# EAGLE board AVR-Pocket-Programmer-GiantPanel-v11 (EAGLE 6.5.0), part 1 of 5
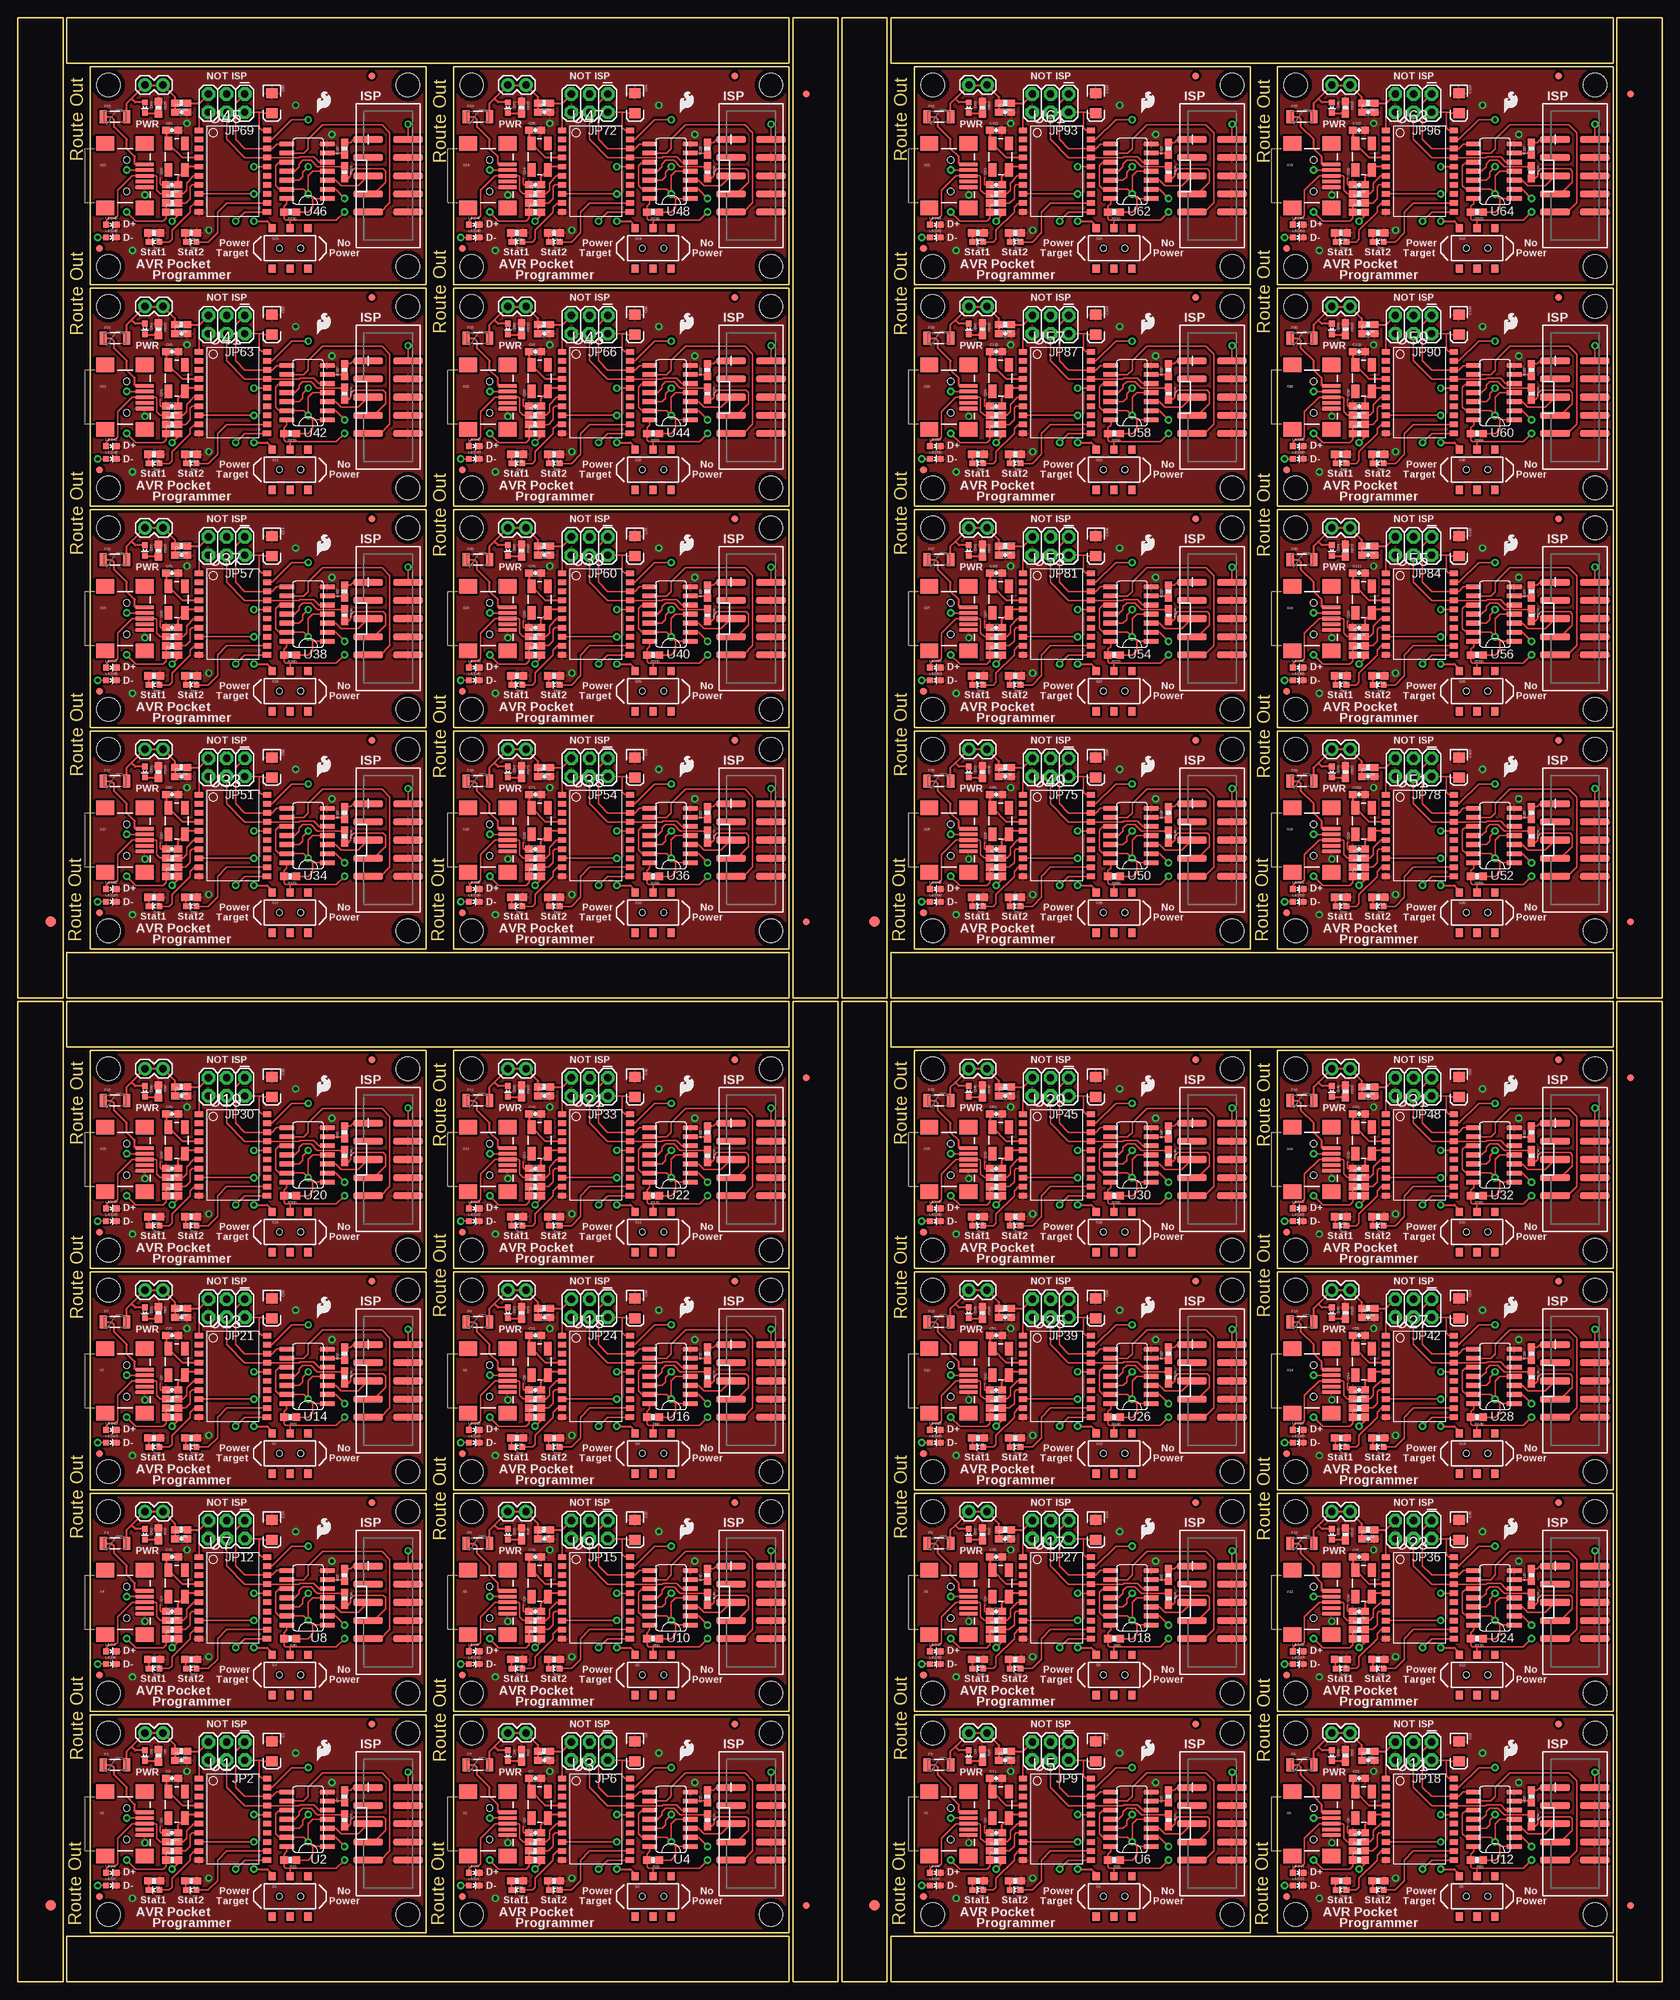
[diagram p0: board, top side]
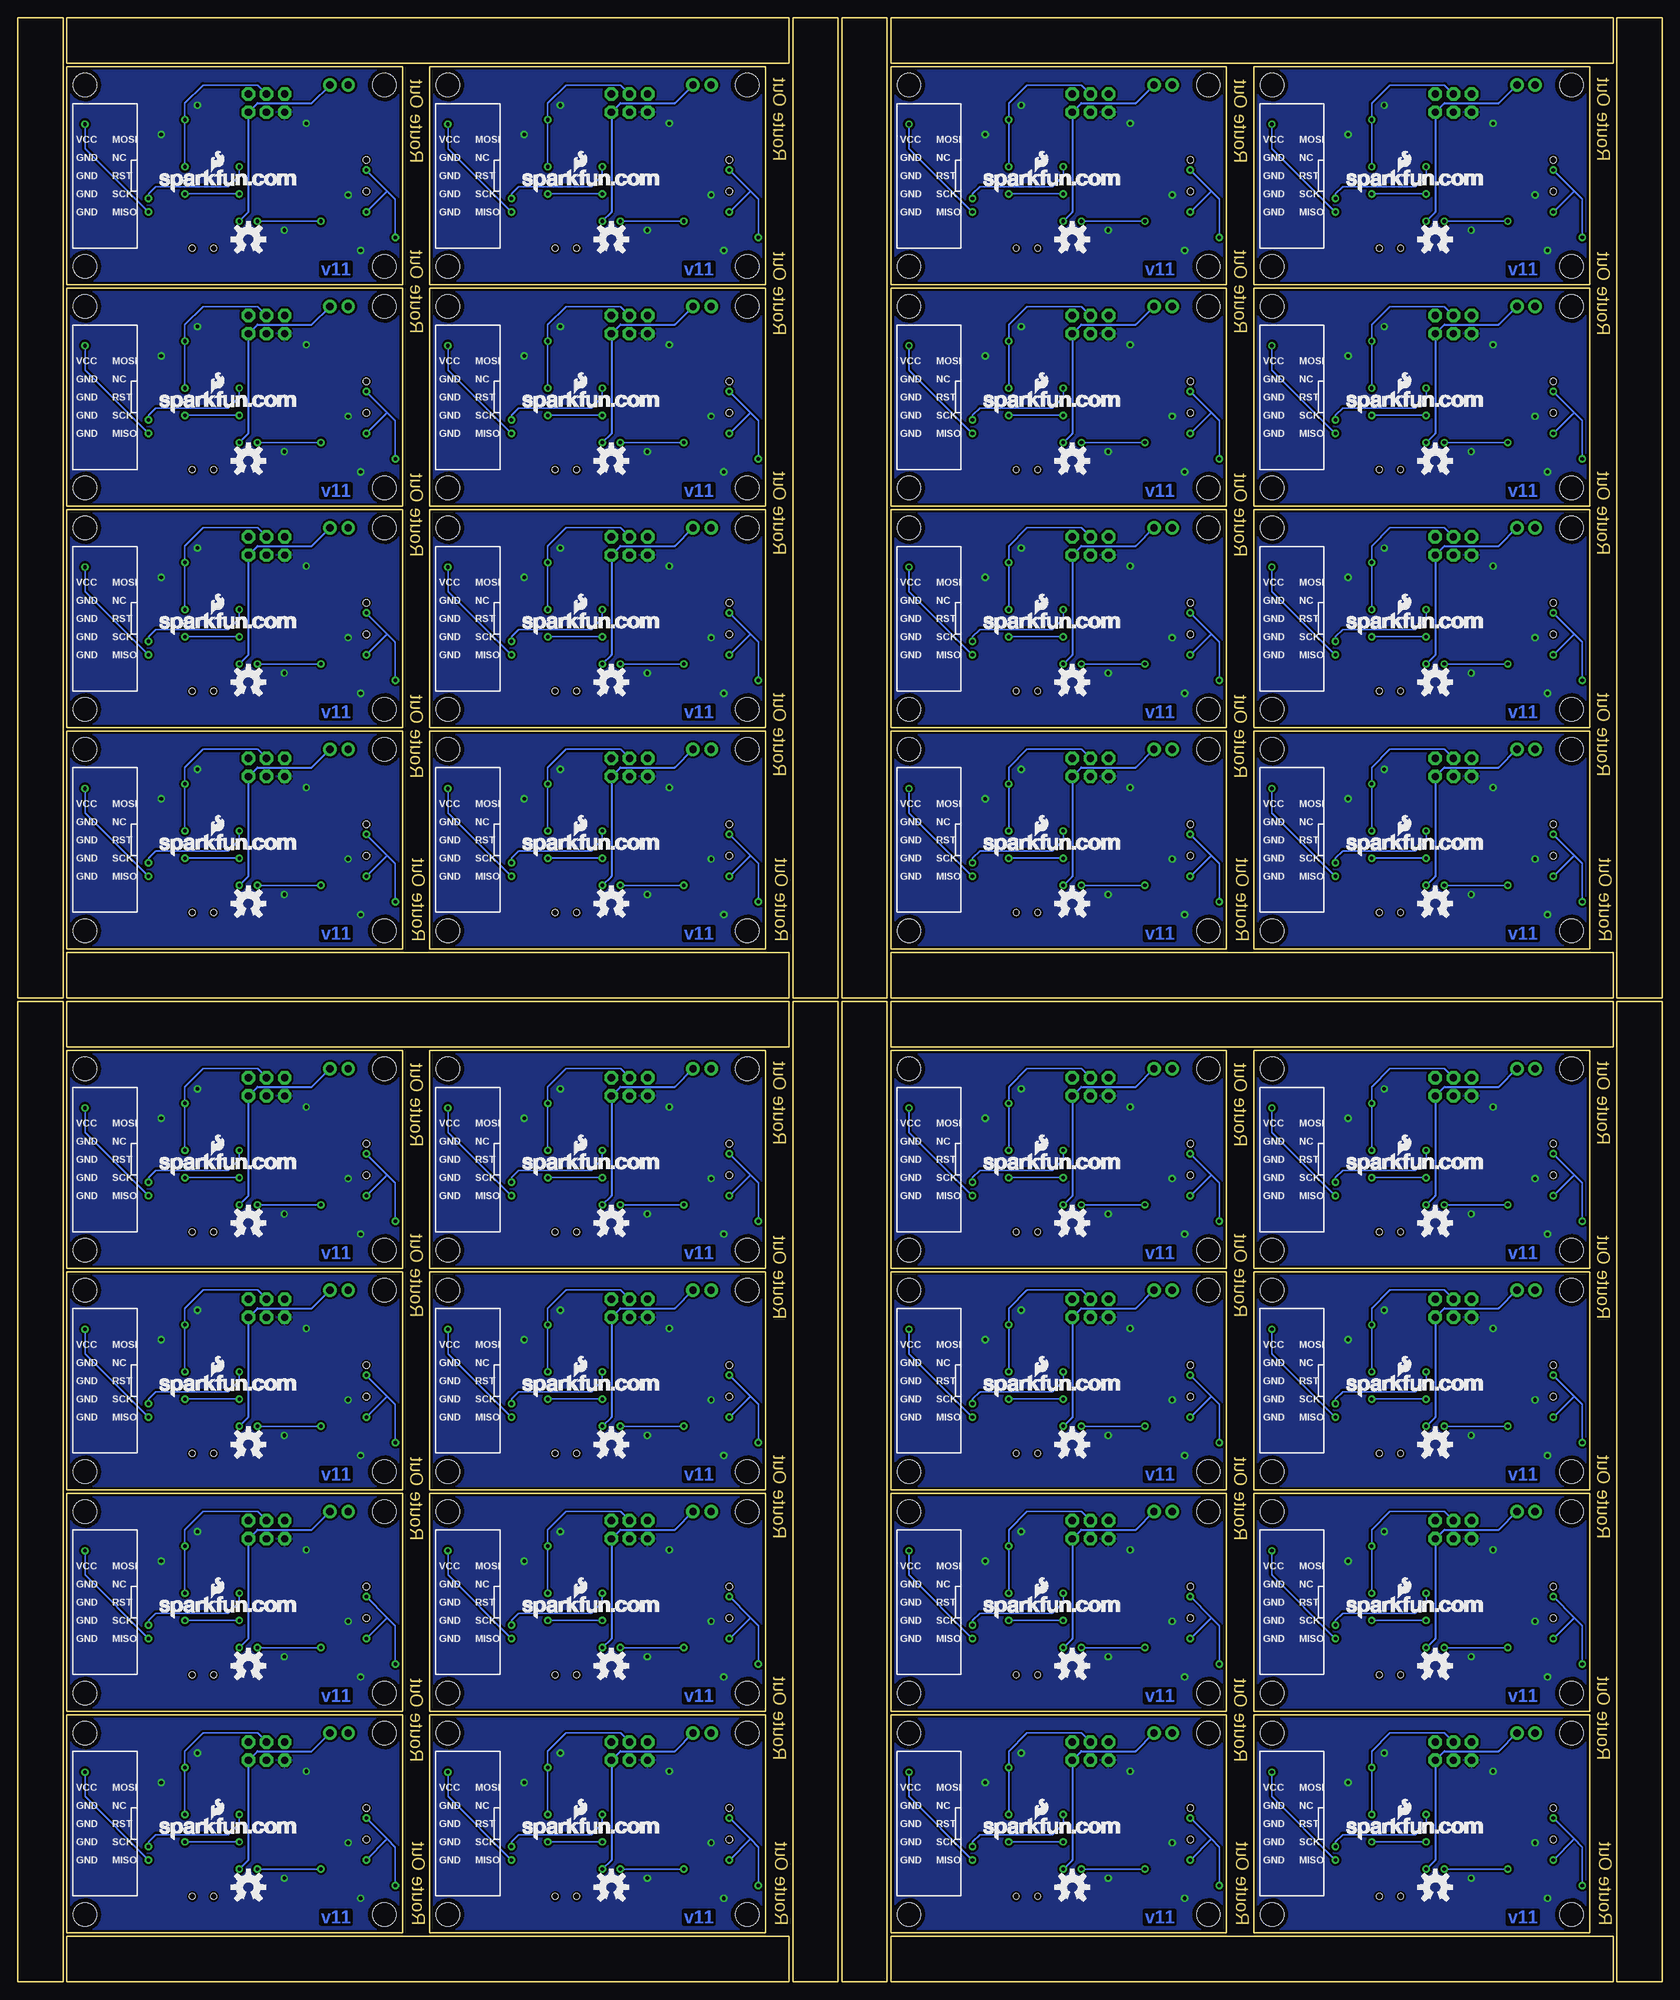
[diagram p1: board, bottom side, seen from below]

Size 230.12 x 274.83 mm. Coordinates in mm from the lower left corner, seen from the top.
Outline: 192 segments
Copper layers (1*16): Top 0.035mm / dielectric 1.5mm / Bottom 0.035mm
Design rules "SparkFun": minimum track width 8mil, minimum drill 20mil, track to track 8mil, track to pad 8mil, pad to pad 8mil, via to via 8mil, smd to smd 8mil, copper to edge 10mil, drill to drill 8mil, minimum pad ring 12mil, minimum via ring 10mil, stop-mask expansion 4mil, vias tented up to drill 20mil, thermal gap 10mil
Net classes: 0 default: width 0.203 mm, drill 0.508 mm, clearance 0.203 mm

## Footprints (pad centres in the part's own frame; a part is rotated, then mirrored left to right if it is on the bottom)
EIA3216 = smd 1.4 x 1.6: A 1.4,0; C -1.4,0
0603-CAP = smd 1.1 x 1: 1 -0.85,0; 2 0.85,0
LED-0603 = smd 0.8 x 0.8: A 0,-0.75; C 0,0.75
FIDUCIAL-1.5X3 = smd 1.5 x 1.5: 1 0,0
FIDUCIAL-1X2 = smd 1 x 1: 1 0,0
PTC-1206-WIDE = smd 1 x 1.8: 1 -1.654,0; 2 1.654,0
1X02 = drill 1.016 pad 1.88: 1 0,0; 2 2.54,0
2X3 = drill 1.016 pad 1.88 octagon: 1 0,0; 2 0,2.54; 3 2.54,0; 4 2.54,2.54; 5 5.08,0; 6 5.08,2.54
2X5-SHROUDED_SMD = smd 4.15 x 1: 1 -2.794,5.08; 2 2.794,5.08; 3 -2.794,2.54; 4 2.794,2.54; 5 -2.794,0; 6 2.794,0; 7 -2.794,-2.54; 8 2.794,-2.54; 9 -2.794,-5.08; 10 2.794,-5.08
CRYSTAL-SMD-5X3 = smd 1.9 x 1.1: 1 -1.85,-1.15; 2 1.85,-1.15; 3 1.85,1.15; 4 -1.85,1.15
0603-RES = smd 1.1 x 1: 1 -0.85,0; 2 0.85,0
AYZ0202 = smd 1 x 1.15: 1 -2.5,2.825; 2 0,2.825; 3 2.5,2.825; 4 -2.5,-2.825; 5 0,-2.825; 6 2.5,-2.825 | hole 0.85: 1.5,0; -1.5,0
SO20L = smd 0.762 x 1.143: 1 -5.08,-5.131; 2 -3.81,-5.131; 3 -2.54,-5.131; 4 -1.27,-5.131; 5 0,-5.131; 6 1.27,-5.131; 7 2.54,-5.131; 8 3.81,-5.131; 9 5.08,-5.131; 10 6.35,-5.131; 11 6.35,4.369; 12 5.08,4.394; 13 3.81,4.394; 14 2.54,4.394; 15 1.27,4.394; 16 0,4.394; 17 -1.27,4.394; 18 -2.54,4.394; 19 -3.81,4.394; 20 -5.08,4.394
SO014 = smd 0.66 x 2.032: 1 -3.175,-2.68; 2 -1.905,-2.68; 3 -0.635,-2.68; 4 0.635,-2.68; 5 1.905,-2.68; 6 3.175,-2.68; 7 4.445,-2.68; 8 4.445,2.997; 9 3.175,2.997; 10 1.905,2.997; 11 0.635,2.997; 12 -0.635,2.997; 13 -1.905,2.997; 14 -3.175,2.997
STAND-OFF = hole 3.302: 0,0
USB-MINIB = smd 2.5 x 0.5: D+ 2.5,0; D- 2.5,0.8; GND 2.5,-1.6; ID 2.5,-0.8; VBUS 2.5,1.6 | smd 2.5 x 2: GND@1 -3,-4.5; GND@2 -3,4.5; GND@3 2.5,4.5; GND@4 2.5,-4.5 | hole 0.9: 0,2.2; 0,-2.2

## Placement (x,y rotation side)
C1  10uF  [EIA3216]  35.56,32.26 270 top
C2  0.1uF  [0603-CAP]  22.86,30.99 0 top
C3  22pF  [0603-CAP]  21.59,28.45 0 top
C4  22pF  [0603-CAP]  21.59,20.83 180 top
C5  0.1uF  [0603-CAP]  73.66,30.99 0 top
C6  10uF  [EIA3216]  86.36,32.26 270 top
C7  22pF  [0603-CAP]  72.39,28.45 0 top
C8  22pF  [0603-CAP]  72.39,20.83 180 top
C9  0.1uF  [0603-CAP]  138.18,30.99 0 top
C10  10uF  [EIA3216]  150.88,32.26 270 top
C11  22pF  [0603-CAP]  136.91,28.45 0 top
C12  22pF  [0603-CAP]  136.91,20.83 180 top
C13  0.1uF  [0603-CAP]  22.86,61.98 0 top
C14  10uF  [EIA3216]  35.56,63.25 270 top
C15  22pF  [0603-CAP]  21.59,59.44 0 top
C16  22pF  [0603-CAP]  21.59,51.82 180 top
C17  0.1uF  [0603-CAP]  73.66,61.98 0 top
C18  10uF  [EIA3216]  86.36,63.25 270 top
C19  22pF  [0603-CAP]  72.39,59.44 0 top
C20  22pF  [0603-CAP]  72.39,51.82 180 top
C21  0.1uF  [0603-CAP]  188.98,30.99 0 top
C22  10uF  [EIA3216]  201.68,32.26 270 top
C23  22pF  [0603-CAP]  187.71,28.45 0 top
C24  22pF  [0603-CAP]  187.71,20.83 180 top
C25  0.1uF  [0603-CAP]  22.86,92.96 0 top
C26  10uF  [EIA3216]  35.56,94.23 270 top
C27  22pF  [0603-CAP]  21.59,90.42 0 top
C28  22pF  [0603-CAP]  21.59,82.8 180 top
C29  0.1uF  [0603-CAP]  73.66,92.96 0 top
C30  10uF  [EIA3216]  86.36,94.23 270 top
C31  22pF  [0603-CAP]  72.39,90.42 0 top
C32  22pF  [0603-CAP]  72.39,82.8 180 top
C33  0.1uF  [0603-CAP]  138.18,61.98 0 top
C34  10uF  [EIA3216]  150.88,63.25 270 top
C35  22pF  [0603-CAP]  136.91,59.44 0 top
C36  22pF  [0603-CAP]  136.91,51.82 180 top
C37  0.1uF  [0603-CAP]  22.86,123.95 0 top
C38  10uF  [EIA3216]  35.56,125.22 270 top
C39  22pF  [0603-CAP]  21.59,121.41 0 top
C40  22pF  [0603-CAP]  21.59,113.79 180 top
C41  0.1uF  [0603-CAP]  73.66,123.95 0 top
C42  10uF  [EIA3216]  86.36,125.22 270 top
C43  22pF  [0603-CAP]  72.39,121.41 0 top
C44  22pF  [0603-CAP]  72.39,113.79 180 top
C45  0.1uF  [0603-CAP]  188.98,61.98 0 top
C46  10uF  [EIA3216]  201.68,63.25 270 top
C47  22pF  [0603-CAP]  187.71,59.44 0 top
C48  22pF  [0603-CAP]  187.71,51.82 180 top
C49  0.1uF  [0603-CAP]  138.18,92.96 0 top
C50  10uF  [EIA3216]  150.88,94.23 270 top
C51  22pF  [0603-CAP]  136.91,90.42 0 top
C52  22pF  [0603-CAP]  136.91,82.8 180 top
C53  0.1uF  [0603-CAP]  188.98,92.96 0 top
C54  10uF  [EIA3216]  201.68,94.23 270 top
C55  22pF  [0603-CAP]  187.71,90.42 0 top
C56  22pF  [0603-CAP]  187.71,82.8 180 top
C57  0.1uF  [0603-CAP]  138.18,123.95 0 top
C58  10uF  [EIA3216]  150.88,125.22 270 top
C59  22pF  [0603-CAP]  136.91,121.41 0 top
C60  22pF  [0603-CAP]  136.91,113.79 180 top
C61  0.1uF  [0603-CAP]  188.98,123.95 0 top
C62  10uF  [EIA3216]  201.68,125.22 270 top
C63  22pF  [0603-CAP]  187.71,121.41 0 top
C64  22pF  [0603-CAP]  187.71,113.79 180 top
C65  0.1uF  [0603-CAP]  22.86,168.66 0 top
C66  10uF  [EIA3216]  35.56,169.93 270 top
C67  22pF  [0603-CAP]  21.59,166.12 0 top
C68  22pF  [0603-CAP]  21.59,158.5 180 top
C69  0.1uF  [0603-CAP]  73.66,168.66 0 top
C70  10uF  [EIA3216]  86.36,169.93 270 top
C71  22pF  [0603-CAP]  72.39,166.12 0 top
C72  22pF  [0603-CAP]  72.39,158.5 180 top
C73  0.1uF  [0603-CAP]  22.86,199.64 0 top
C74  10uF  [EIA3216]  35.56,200.91 270 top
C75  22pF  [0603-CAP]  21.59,197.1 0 top
C76  22pF  [0603-CAP]  21.59,189.48 180 top
C77  0.1uF  [0603-CAP]  73.66,199.64 0 top
C78  10uF  [EIA3216]  86.36,200.91 270 top
C79  22pF  [0603-CAP]  72.39,197.1 0 top
C80  22pF  [0603-CAP]  72.39,189.48 180 top
C81  0.1uF  [0603-CAP]  22.86,230.63 0 top
C82  10uF  [EIA3216]  35.56,231.9 270 top
C83  22pF  [0603-CAP]  21.59,228.09 0 top
C84  22pF  [0603-CAP]  21.59,220.47 180 top
C85  0.1uF  [0603-CAP]  73.66,230.63 0 top
C86  10uF  [EIA3216]  86.36,231.9 270 top
C87  22pF  [0603-CAP]  72.39,228.09 0 top
C88  22pF  [0603-CAP]  72.39,220.47 180 top
C89  0.1uF  [0603-CAP]  22.86,261.62 0 top
C90  10uF  [EIA3216]  35.56,262.89 270 top
C91  22pF  [0603-CAP]  21.59,259.08 0 top
C92  22pF  [0603-CAP]  21.59,251.46 180 top
C93  0.1uF  [0603-CAP]  73.66,261.62 0 top
C94  10uF  [EIA3216]  86.36,262.89 270 top
C95  22pF  [0603-CAP]  72.39,259.08 0 top
C96  22pF  [0603-CAP]  72.39,251.46 180 top
C97  0.1uF  [0603-CAP]  138.18,168.66 0 top
C98  10uF  [EIA3216]  150.88,169.93 270 top
C99  22pF  [0603-CAP]  136.91,166.12 0 top
C100  22pF  [0603-CAP]  136.91,158.5 180 top
C101  0.1uF  [0603-CAP]  188.98,168.66 0 top
C102  10uF  [EIA3216]  201.68,169.93 270 top
C103  22pF  [0603-CAP]  187.71,166.12 0 top
C104  22pF  [0603-CAP]  187.71,158.5 180 top
C105  0.1uF  [0603-CAP]  138.18,199.64 0 top
C106  10uF  [EIA3216]  150.88,200.91 270 top
C107  22pF  [0603-CAP]  136.91,197.1 0 top
C108  22pF  [0603-CAP]  136.91,189.48 180 top
C109  0.1uF  [0603-CAP]  188.98,199.64 0 top
C110  10uF  [EIA3216]  201.68,200.91 270 top
C111  22pF  [0603-CAP]  187.71,197.1 0 top
C112  22pF  [0603-CAP]  187.71,189.48 180 top
C113  0.1uF  [0603-CAP]  138.18,230.63 0 top
C114  10uF  [EIA3216]  150.88,231.9 270 top
C115  22pF  [0603-CAP]  136.91,228.09 0 top
C116  22pF  [0603-CAP]  136.91,220.47 180 top
C117  0.1uF  [0603-CAP]  188.98,230.63 0 top
C118  10uF  [EIA3216]  201.68,231.9 270 top
C119  22pF  [0603-CAP]  187.71,228.09 0 top
C120  22pF  [0603-CAP]  187.71,220.47 180 top
C121  0.1uF  [0603-CAP]  138.18,261.62 0 top
C122  10uF  [EIA3216]  150.88,262.89 270 top
C123  22pF  [0603-CAP]  136.91,259.08 0 top
C124  22pF  [0603-CAP]  136.91,251.46 180 top
C125  0.1uF  [0603-CAP]  188.98,261.62 0 top
C126  10uF  [EIA3216]  201.68,262.89 270 top
C127  22pF  [0603-CAP]  187.71,259.08 0 top
C128  22pF  [0603-CAP]  187.71,251.46 180 top
D1  Blue  [LED-0603]  24.26,12.83 90 top
D2  Red  [LED-0603]  19.05,12.83 90 top
D3  Blue  [LED-0603]  17.78,31.62 180 top
D4  Red  [LED-0603]  69.85,12.83 90 top
D5  Blue  [LED-0603]  75.06,12.83 90 top
D6  Blue  [LED-0603]  68.58,31.62 180 top
D7  Red  [LED-0603]  134.37,12.83 90 top
D8  Blue  [LED-0603]  139.57,12.83 90 top
D9  Blue  [LED-0603]  133.1,31.62 180 top
D10  Red  [LED-0603]  19.05,43.81 90 top
D11  Blue  [LED-0603]  24.26,43.81 90 top
D12  Blue  [LED-0603]  17.78,62.61 180 top
D13  Red  [LED-0603]  69.85,43.81 90 top
D14  Blue  [LED-0603]  75.06,43.81 90 top
D15  Blue  [LED-0603]  68.58,62.61 180 top
D16  Red  [LED-0603]  185.17,12.83 90 top
D17  Blue  [LED-0603]  190.37,12.83 90 top
D18  Blue  [LED-0603]  183.9,31.62 180 top
D19  Red  [LED-0603]  19.05,74.8 90 top
D20  Blue  [LED-0603]  24.26,74.8 90 top
D21  Blue  [LED-0603]  17.78,93.6 180 top
D22  Red  [LED-0603]  69.85,74.8 90 top
D23  Blue  [LED-0603]  75.06,74.8 90 top
D24  Blue  [LED-0603]  68.58,93.6 180 top
D25  Red  [LED-0603]  134.37,43.81 90 top
D26  Blue  [LED-0603]  139.57,43.81 90 top
D27  Blue  [LED-0603]  133.1,62.61 180 top
D28  Red  [LED-0603]  19.05,105.79 90 top
D29  Blue  [LED-0603]  24.26,105.79 90 top
D30  Blue  [LED-0603]  17.78,124.59 180 top
D31  Red  [LED-0603]  69.85,105.79 90 top
D32  Blue  [LED-0603]  75.06,105.79 90 top
D33  Blue  [LED-0603]  68.58,124.59 180 top
D34  Red  [LED-0603]  185.17,43.81 90 top
D35  Blue  [LED-0603]  190.37,43.81 90 top
D36  Blue  [LED-0603]  183.9,62.61 180 top
D37  Red  [LED-0603]  134.37,74.8 90 top
D38  Blue  [LED-0603]  139.57,74.8 90 top
D39  Blue  [LED-0603]  133.1,93.6 180 top
D40  Red  [LED-0603]  185.17,74.8 90 top
D41  Blue  [LED-0603]  190.37,74.8 90 top
D42  Blue  [LED-0603]  183.9,93.6 180 top
D43  Red  [LED-0603]  134.37,105.79 90 top
D44  Blue  [LED-0603]  139.57,105.79 90 top
D45  Blue  [LED-0603]  133.1,124.59 180 top
D46  Red  [LED-0603]  185.17,105.79 90 top
D47  Blue  [LED-0603]  190.37,105.79 90 top
D48  Blue  [LED-0603]  183.9,124.59 180 top
D49  Red  [LED-0603]  19.05,150.5 90 top
D50  Blue  [LED-0603]  24.26,150.5 90 top
D51  Blue  [LED-0603]  17.78,169.29 180 top
D52  Red  [LED-0603]  69.85,150.5 90 top
D53  Blue  [LED-0603]  75.06,150.5 90 top
D54  Blue  [LED-0603]  68.58,169.29 180 top
D55  Red  [LED-0603]  19.05,181.48 90 top
D56  Blue  [LED-0603]  24.26,181.48 90 top
D57  Blue  [LED-0603]  17.78,200.28 180 top
D58  Red  [LED-0603]  69.85,181.48 90 top
D59  Blue  [LED-0603]  75.06,181.48 90 top
D60  Blue  [LED-0603]  68.58,200.28 180 top
D61  Red  [LED-0603]  19.05,212.47 90 top
D62  Blue  [LED-0603]  24.26,212.47 90 top
D63  Blue  [LED-0603]  17.78,231.27 180 top
D64  Red  [LED-0603]  69.85,212.47 90 top
D65  Blue  [LED-0603]  75.06,212.47 90 top
D66  Blue  [LED-0603]  68.58,231.27 180 top
D67  Red  [LED-0603]  19.05,243.46 90 top
D68  Blue  [LED-0603]  24.26,243.46 90 top
D69  Blue  [LED-0603]  17.78,262.25 180 top
D70  Red  [LED-0603]  69.85,243.46 90 top
D71  Blue  [LED-0603]  75.06,243.46 90 top
D72  Blue  [LED-0603]  68.58,262.25 180 top
D73  Red  [LED-0603]  134.37,150.5 90 top
D74  Blue  [LED-0603]  139.57,150.5 90 top
D75  Blue  [LED-0603]  133.1,169.29 180 top
D76  Red  [LED-0603]  185.17,150.5 90 top
D77  Blue  [LED-0603]  190.37,150.5 90 top
D78  Blue  [LED-0603]  183.9,169.29 180 top
D79  Red  [LED-0603]  134.37,181.48 90 top
D80  Blue  [LED-0603]  139.57,181.48 90 top
D81  Blue  [LED-0603]  133.1,200.28 180 top
D82  Red  [LED-0603]  185.17,181.48 90 top
D83  Blue  [LED-0603]  190.37,181.48 90 top
D84  Blue  [LED-0603]  183.9,200.28 180 top
D85  Red  [LED-0603]  134.37,212.47 90 top
D86  Blue  [LED-0603]  139.57,212.47 90 top
D87  Blue  [LED-0603]  133.1,231.27 180 top
D88  Red  [LED-0603]  185.17,212.47 90 top
D89  Blue  [LED-0603]  190.37,212.47 90 top
D90  Blue  [LED-0603]  183.9,231.27 180 top
D91  Red  [LED-0603]  134.37,243.46 90 top
D92  Blue  [LED-0603]  139.57,243.46 90 top
D93  Blue  [LED-0603]  133.1,262.25 180 top
D94  Red  [LED-0603]  185.17,243.46 90 top
D95  Blue  [LED-0603]  190.37,243.46 90 top
D96  Blue  [LED-0603]  183.9,262.25 180 top
E$1  [FIDUCIAL-1.5X3]  4.57,10.67 0 top
E$2  [FIDUCIAL-1X2]  225.68,126.49 180 top
E$3  [FIDUCIAL-1X2]  225.68,10.67 0 top
E$4  [FIDUCIAL-1.5X3]  119.89,10.67 0 top
E$5  [FIDUCIAL-1X2]  110.36,126.49 180 top
E$6  [FIDUCIAL-1X2]  110.36,10.67 0 top
E$7  [FIDUCIAL-1X2]  110.36,264.16 180 top
E$8  [FIDUCIAL-1X2]  110.36,148.34 0 top
E$9  [FIDUCIAL-1.5X3]  4.57,148.34 0 top
E$10  [FIDUCIAL-1X2]  225.68,264.16 180 top
E$11  [FIDUCIAL-1X2]  225.68,148.34 0 top
E$12  [FIDUCIAL-1.5X3]  119.89,148.34 0 top
F1  500mA  [PTC-1206-WIDE]  13.59,30.35 0 top
F2  500mA  [PTC-1206-WIDE]  64.39,30.35 0 top
F3  500mA  [PTC-1206-WIDE]  128.91,30.35 0 top
F4  500mA  [PTC-1206-WIDE]  13.59,61.34 0 top
F5  500mA  [PTC-1206-WIDE]  64.39,61.34 0 top
F6  500mA  [PTC-1206-WIDE]  179.71,30.35 0 top
F7  500mA  [PTC-1206-WIDE]  13.59,92.33 0 top
F8  500mA  [PTC-1206-WIDE]  64.39,92.33 0 top
F9  500mA  [PTC-1206-WIDE]  128.91,61.34 0 top
F10  500mA  [PTC-1206-WIDE]  13.59,123.32 0 top
F11  500mA  [PTC-1206-WIDE]  64.39,123.32 0 top
F12  500mA  [PTC-1206-WIDE]  179.71,61.34 0 top
F13  500mA  [PTC-1206-WIDE]  128.91,92.33 0 top
F14  500mA  [PTC-1206-WIDE]  179.71,92.33 0 top
F15  500mA  [PTC-1206-WIDE]  128.91,123.32 0 top
F16  500mA  [PTC-1206-WIDE]  179.71,123.32 0 top
F17  500mA  [PTC-1206-WIDE]  13.59,168.02 0 top
F18  500mA  [PTC-1206-WIDE]  64.39,168.02 0 top
F19  500mA  [PTC-1206-WIDE]  13.59,199.01 0 top
F20  500mA  [PTC-1206-WIDE]  64.39,199.01 0 top
F21  500mA  [PTC-1206-WIDE]  13.59,230 0 top
F22  500mA  [PTC-1206-WIDE]  64.39,230 0 top
F23  500mA  [PTC-1206-WIDE]  13.59,260.99 0 top
F24  500mA  [PTC-1206-WIDE]  64.39,260.99 0 top
F25  500mA  [PTC-1206-WIDE]  128.91,168.02 0 top
F26  500mA  [PTC-1206-WIDE]  179.71,168.02 0 top
F27  500mA  [PTC-1206-WIDE]  128.91,199.01 0 top
F28  500mA  [PTC-1206-WIDE]  179.71,199.01 0 top
F29  500mA  [PTC-1206-WIDE]  128.91,230 0 top
F30  500mA  [PTC-1206-WIDE]  179.71,230 0 top
F31  500mA  [PTC-1206-WIDE]  128.91,260.99 0 top
F32  500mA  [PTC-1206-WIDE]  179.71,260.99 0 top
JP1  Power Select  [1X02]  17.78,34.8 0 top
JP2  AVR_SPI_PRG_6PTH  [2X3]  31.75,33.53 180 top
JP3  AVR_SPI_PROG2SHROUDED_SMD  [2X5-SHROUDED_SMD]  51.82,22.1 0 top
JP4  Power Select  [1X02]  68.58,34.8 0 top
JP5  AVR_SPI_PROG2SHROUDED_SMD  [2X5-SHROUDED_SMD]  102.62,22.1 0 top
JP6  AVR_SPI_PRG_6PTH  [2X3]  82.55,33.53 180 top
JP7  Power Select  [1X02]  133.1,34.8 0 top
JP8  AVR_SPI_PROG2SHROUDED_SMD  [2X5-SHROUDED_SMD]  167.13,22.1 0 top
JP9  AVR_SPI_PRG_6PTH  [2X3]  147.07,33.53 180 top
JP10  Power Select  [1X02]  17.78,65.79 0 top
JP11  AVR_SPI_PROG2SHROUDED_SMD  [2X5-SHROUDED_SMD]  51.82,53.09 0 top
JP12  AVR_SPI_PRG_6PTH  [2X3]  31.75,64.52 180 top
JP13  Power Select  [1X02]  68.58,65.79 0 top
JP14  AVR_SPI_PROG2SHROUDED_SMD  [2X5-SHROUDED_SMD]  102.62,53.09 0 top
JP15  AVR_SPI_PRG_6PTH  [2X3]  82.55,64.52 180 top
JP16  Power Select  [1X02]  183.9,34.8 0 top
JP17  AVR_SPI_PROG2SHROUDED_SMD  [2X5-SHROUDED_SMD]  217.93,22.1 0 top
JP18  AVR_SPI_PRG_6PTH  [2X3]  197.87,33.53 180 top
JP19  Power Select  [1X02]  17.78,96.77 0 top
JP20  AVR_SPI_PROG2SHROUDED_SMD  [2X5-SHROUDED_SMD]  51.82,84.07 0 top
JP21  AVR_SPI_PRG_6PTH  [2X3]  31.75,95.5 180 top
JP22  Power Select  [1X02]  68.58,96.77 0 top
JP23  AVR_SPI_PROG2SHROUDED_SMD  [2X5-SHROUDED_SMD]  102.62,84.07 0 top
JP24  AVR_SPI_PRG_6PTH  [2X3]  82.55,95.5 180 top
JP25  Power Select  [1X02]  133.1,65.79 0 top
JP26  AVR_SPI_PROG2SHROUDED_SMD  [2X5-SHROUDED_SMD]  167.13,53.09 0 top
JP27  AVR_SPI_PRG_6PTH  [2X3]  147.07,64.52 180 top
JP28  Power Select  [1X02]  17.78,127.76 0 top
JP29  AVR_SPI_PROG2SHROUDED_SMD  [2X5-SHROUDED_SMD]  51.82,115.06 0 top
JP30  AVR_SPI_PRG_6PTH  [2X3]  31.75,126.49 180 top
JP31  Power Select  [1X02]  68.58,127.76 0 top
JP32  AVR_SPI_PROG2SHROUDED_SMD  [2X5-SHROUDED_SMD]  102.62,115.06 0 top
JP33  AVR_SPI_PRG_6PTH  [2X3]  82.55,126.49 180 top
JP34  Power Select  [1X02]  183.9,65.79 0 top
JP35  AVR_SPI_PROG2SHROUDED_SMD  [2X5-SHROUDED_SMD]  217.93,53.09 0 top
JP36  AVR_SPI_PRG_6PTH  [2X3]  197.87,64.52 180 top
JP37  Power Select  [1X02]  133.1,96.77 0 top
JP38  AVR_SPI_PROG2SHROUDED_SMD  [2X5-SHROUDED_SMD]  167.13,84.07 0 top
JP39  AVR_SPI_PRG_6PTH  [2X3]  147.07,95.5 180 top
JP40  Power Select  [1X02]  183.9,96.77 0 top
JP41  AVR_SPI_PROG2SHROUDED_SMD  [2X5-SHROUDED_SMD]  217.93,84.07 0 top
JP42  AVR_SPI_PRG_6PTH  [2X3]  197.87,95.5 180 top
JP43  Power Select  [1X02]  133.1,127.76 0 top
JP44  AVR_SPI_PROG2SHROUDED_SMD  [2X5-SHROUDED_SMD]  167.13,115.06 0 top
JP45  AVR_SPI_PRG_6PTH  [2X3]  147.07,126.49 180 top
JP46  Power Select  [1X02]  183.9,127.76 0 top
JP47  AVR_SPI_PROG2SHROUDED_SMD  [2X5-SHROUDED_SMD]  217.93,115.06 0 top
JP48  AVR_SPI_PRG_6PTH  [2X3]  197.87,126.49 180 top
JP49  Power Select  [1X02]  17.78,172.47 0 top
JP50  AVR_SPI_PROG2SHROUDED_SMD  [2X5-SHROUDED_SMD]  51.82,159.77 0 top
JP51  AVR_SPI_PRG_6PTH  [2X3]  31.75,171.2 180 top
JP52  Power Select  [1X02]  68.58,172.47 0 top
JP53  AVR_SPI_PROG2SHROUDED_SMD  [2X5-SHROUDED_SMD]  102.62,159.77 0 top
JP54  AVR_SPI_PRG_6PTH  [2X3]  82.55,171.2 180 top
JP55  Power Select  [1X02]  17.78,203.45 0 top
JP56  AVR_SPI_PROG2SHROUDED_SMD  [2X5-SHROUDED_SMD]  51.82,190.75 0 top
JP57  AVR_SPI_PRG_6PTH  [2X3]  31.75,202.18 180 top
JP58  Power Select  [1X02]  68.58,203.45 0 top
JP59  AVR_SPI_PROG2SHROUDED_SMD  [2X5-SHROUDED_SMD]  102.62,190.75 0 top
JP60  AVR_SPI_PRG_6PTH  [2X3]  82.55,202.18 180 top
JP61  Power Select  [1X02]  17.78,234.44 0 top
JP62  AVR_SPI_PROG2SHROUDED_SMD  [2X5-SHROUDED_SMD]  51.82,221.74 0 top
JP63  AVR_SPI_PRG_6PTH  [2X3]  31.75,233.17 180 top
JP64  Power Select  [1X02]  68.58,234.44 0 top
JP65  AVR_SPI_PROG2SHROUDED_SMD  [2X5-SHROUDED_SMD]  102.62,221.74 0 top
JP66  AVR_SPI_PRG_6PTH  [2X3]  82.55,233.17 180 top
JP67  Power Select  [1X02]  17.78,265.43 0 top
JP68  AVR_SPI_PROG2SHROUDED_SMD  [2X5-SHROUDED_SMD]  51.82,252.73 0 top
JP69  AVR_SPI_PRG_6PTH  [2X3]  31.75,264.16 180 top
JP70  Power Select  [1X02]  68.58,265.43 0 top
JP71  AVR_SPI_PROG2SHROUDED_SMD  [2X5-SHROUDED_SMD]  102.62,252.73 0 top
JP72  AVR_SPI_PRG_6PTH  [2X3]  82.55,264.16 180 top
JP73  Power Select  [1X02]  133.1,172.47 0 top
JP74  AVR_SPI_PROG2SHROUDED_SMD  [2X5-SHROUDED_SMD]  167.13,159.77 0 top
JP75  AVR_SPI_PRG_6PTH  [2X3]  147.07,171.2 180 top
JP76  Power Select  [1X02]  183.9,172.47 0 top
JP77  AVR_SPI_PROG2SHROUDED_SMD  [2X5-SHROUDED_SMD]  217.93,159.77 0 top
JP78  AVR_SPI_PRG_6PTH  [2X3]  197.87,171.2 180 top
JP79  Power Select  [1X02]  133.1,203.45 0 top
JP80  AVR_SPI_PROG2SHROUDED_SMD  [2X5-SHROUDED_SMD]  167.13,190.75 0 top
JP81  AVR_SPI_PRG_6PTH  [2X3]  147.07,202.18 180 top
JP82  Power Select  [1X02]  183.9,203.45 0 top
JP83  AVR_SPI_PROG2SHROUDED_SMD  [2X5-SHROUDED_SMD]  217.93,190.75 0 top
JP84  AVR_SPI_PRG_6PTH  [2X3]  197.87,202.18 180 top
JP85  Power Select  [1X02]  133.1,234.44 0 top
JP86  AVR_SPI_PROG2SHROUDED_SMD  [2X5-SHROUDED_SMD]  167.13,221.74 0 top
JP87  AVR_SPI_PRG_6PTH  [2X3]  147.07,233.17 180 top
JP88  Power Select  [1X02]  183.9,234.44 0 top
JP89  AVR_SPI_PROG2SHROUDED_SMD  [2X5-SHROUDED_SMD]  217.93,221.74 0 top
JP90  AVR_SPI_PRG_6PTH  [2X3]  197.87,233.17 180 top
JP91  Power Select  [1X02]  133.1,265.43 0 top
JP92  AVR_SPI_PROG2SHROUDED_SMD  [2X5-SHROUDED_SMD]  167.13,252.73 0 top
JP93  AVR_SPI_PRG_6PTH  [2X3]  147.07,264.16 180 top
JP94  Power Select  [1X02]  183.9,265.43 0 top
JP95  AVR_SPI_PROG2SHROUDED_SMD  [2X5-SHROUDED_SMD]  217.93,252.73 0 top
JP96  AVR_SPI_PRG_6PTH  [2X3]  197.87,264.16 180 top
LED1  Blue  [LED-0603]  13.08,15.24 270 top
LED2  Blue  [LED-0603]  13.08,13.46 270 top
LED3  Blue  [LED-0603]  63.88,15.24 270 top
LED4  Blue  [LED-0603]  63.88,13.46 270 top
LED5  Blue  [LED-0603]  128.4,15.24 270 top
LED6  Blue  [LED-0603]  128.4,13.46 270 top
LED7  Blue  [LED-0603]  13.08,46.23 270 top
LED8  Blue  [LED-0603]  13.08,44.45 270 top
LED9  Blue  [LED-0603]  63.88,46.23 270 top
LED10  Blue  [LED-0603]  63.88,44.45 270 top
LED11  Blue  [LED-0603]  179.2,15.24 270 top
LED12  Blue  [LED-0603]  179.2,13.46 270 top
LED13  Blue  [LED-0603]  13.08,77.22 270 top
LED14  Blue  [LED-0603]  13.08,75.44 270 top
LED15  Blue  [LED-0603]  63.88,77.22 270 top
LED16  Blue  [LED-0603]  63.88,75.44 270 top
LED17  Blue  [LED-0603]  128.4,46.23 270 top
LED18  Blue  [LED-0603]  128.4,44.45 270 top
LED19  Blue  [LED-0603]  13.08,108.2 270 top
LED20  Blue  [LED-0603]  13.08,106.43 270 top
LED21  Blue  [LED-0603]  63.88,108.2 270 top
LED22  Blue  [LED-0603]  63.88,106.43 270 top
LED23  Blue  [LED-0603]  179.2,46.23 270 top
LED24  Blue  [LED-0603]  179.2,44.45 270 top
LED25  Blue  [LED-0603]  128.4,77.22 270 top
LED26  Blue  [LED-0603]  128.4,75.44 270 top
LED27  Blue  [LED-0603]  179.2,77.22 270 top
LED28  Blue  [LED-0603]  179.2,75.44 270 top
LED29  Blue  [LED-0603]  128.4,108.2 270 top
LED30  Blue  [LED-0603]  128.4,106.43 270 top
LED31  Blue  [LED-0603]  179.2,108.2 270 top
LED32  Blue  [LED-0603]  179.2,106.43 270 top
LED33  Blue  [LED-0603]  13.08,152.91 270 top
LED34  Blue  [LED-0603]  13.08,151.13 270 top
LED35  Blue  [LED-0603]  63.88,152.91 270 top
LED36  Blue  [LED-0603]  63.88,151.13 270 top
LED37  Blue  [LED-0603]  13.08,183.9 270 top
LED38  Blue  [LED-0603]  13.08,182.12 270 top
LED39  Blue  [LED-0603]  63.88,183.9 270 top
LED40  Blue  [LED-0603]  63.88,182.12 270 top
LED41  Blue  [LED-0603]  13.08,214.88 270 top
LED42  Blue  [LED-0603]  13.08,213.11 270 top
LED43  Blue  [LED-0603]  63.88,214.88 270 top
LED44  Blue  [LED-0603]  63.88,213.11 270 top
LED45  Blue  [LED-0603]  13.08,245.87 270 top
LED46  Blue  [LED-0603]  13.08,244.09 270 top
LED47  Blue  [LED-0603]  63.88,245.87 270 top
LED48  Blue  [LED-0603]  63.88,244.09 270 top
LED49  Blue  [LED-0603]  128.4,152.91 270 top
LED50  Blue  [LED-0603]  128.4,151.13 270 top
LED51  Blue  [LED-0603]  179.2,152.91 270 top
LED52  Blue  [LED-0603]  179.2,151.13 270 top
LED53  Blue  [LED-0603]  128.4,183.9 270 top
LED54  Blue  [LED-0603]  128.4,182.12 270 top
LED55  Blue  [LED-0603]  179.2,183.9 270 top
LED56  Blue  [LED-0603]  179.2,182.12 270 top
LED57  Blue  [LED-0603]  128.4,214.88 270 top
LED58  Blue  [LED-0603]  128.4,213.11 270 top
LED59  Blue  [LED-0603]  179.2,214.88 270 top
LED60  Blue  [LED-0603]  179.2,213.11 270 top
LED61  Blue  [LED-0603]  128.4,245.87 270 top
LED62  Blue  [LED-0603]  128.4,244.09 270 top
LED63  Blue  [LED-0603]  179.2,245.87 270 top
LED64  Blue  [LED-0603]  179.2,244.09 270 top
LOGO1  OSHW-LOGOM  [OSHW-LOGO-M]  31.75,13.21 0 bottom
LOGO2  OSHW-LOGOM  [OSHW-LOGO-M]  82.55,13.21 0 bottom
LOGO3  OSHW-LOGOM  [OSHW-LOGO-M]  147.07,13.21 0 bottom
LOGO4  OSHW-LOGOM  [OSHW-LOGO-M]  31.75,44.2 0 bottom
LOGO5  OSHW-LOGOM  [OSHW-LOGO-M]  82.55,44.2 0 bottom
LOGO6  OSHW-LOGOM  [OSHW-LOGO-M]  197.87,13.21 0 bottom
LOGO7  OSHW-LOGOM  [OSHW-LOGO-M]  31.75,75.18 0 bottom
LOGO8  OSHW-LOGOM  [OSHW-LOGO-M]  82.55,75.18 0 bottom
LOGO9  OSHW-LOGOM  [OSHW-LOGO-M]  147.07,44.2 0 bottom
LOGO10  OSHW-LOGOM  [OSHW-LOGO-M]  31.75,106.17 0 bottom
LOGO11  OSHW-LOGOM  [OSHW-LOGO-M]  82.55,106.17 0 bottom
LOGO12  OSHW-LOGOM  [OSHW-LOGO-M]  197.87,44.2 0 bottom
LOGO13  OSHW-LOGOM  [OSHW-LOGO-M]  147.07,75.18 0 bottom
LOGO14  OSHW-LOGOM  [OSHW-LOGO-M]  197.87,75.18 0 bottom
LOGO15  OSHW-LOGOM  [OSHW-LOGO-M]  147.07,106.17 0 bottom
LOGO16  OSHW-LOGOM  [OSHW-LOGO-M]  197.87,106.17 0 bottom
LOGO17  OSHW-LOGOM  [OSHW-LOGO-M]  31.75,150.88 0 bottom
LOGO18  OSHW-LOGOM  [OSHW-LOGO-M]  82.55,150.88 0 bottom
LOGO19  OSHW-LOGOM  [OSHW-LOGO-M]  31.75,181.86 0 bottom
LOGO20  OSHW-LOGOM  [OSHW-LOGO-M]  82.55,181.86 0 bottom
LOGO21  OSHW-LOGOM  [OSHW-LOGO-M]  31.75,212.85 0 bottom
LOGO22  OSHW-LOGOM  [OSHW-LOGO-M]  82.55,212.85 0 bottom
LOGO23  OSHW-LOGOM  [OSHW-LOGO-M]  31.75,243.84 0 bottom
LOGO24  OSHW-LOGOM  [OSHW-LOGO-M]  82.55,243.84 0 bottom
LOGO25  OSHW-LOGOM  [OSHW-LOGO-M]  147.07,150.88 0 bottom
LOGO26  OSHW-LOGOM  [OSHW-LOGO-M]  197.87,150.88 0 bottom
LOGO27  OSHW-LOGOM  [OSHW-LOGO-M]  147.07,181.86 0 bottom
LOGO28  OSHW-LOGOM  [OSHW-LOGO-M]  197.87,181.86 0 bottom
LOGO29  OSHW-LOGOM  [OSHW-LOGO-M]  147.07,212.85 0 bottom
LOGO30  OSHW-LOGOM  [OSHW-LOGO-M]  197.87,212.85 0 bottom
LOGO31  OSHW-LOGOM  [OSHW-LOGO-M]  147.07,243.84 0 bottom
LOGO32  OSHW-LOGOM  [OSHW-LOGO-M]  197.87,243.84 0 bottom
Q1  12 MHz  [CRYSTAL-SMD-5X3]  22.23,24.77 90 top
Q2  12 MHz  [CRYSTAL-SMD-5X3]  73.03,24.77 90 top
Q3  12 MHz  [CRYSTAL-SMD-5X3]  137.54,24.77 90 top
Q4  12 MHz  [CRYSTAL-SMD-5X3]  22.23,55.75 90 top
Q5  12 MHz  [CRYSTAL-SMD-5X3]  73.03,55.75 90 top
Q6  12 MHz  [CRYSTAL-SMD-5X3]  188.34,24.77 90 top
Q7  12 MHz  [CRYSTAL-SMD-5X3]  22.23,86.74 90 top
Q8  12 MHz  [CRYSTAL-SMD-5X3]  73.03,86.74 90 top
Q9  12 MHz  [CRYSTAL-SMD-5X3]  137.54,55.75 90 top
Q10  12 MHz  [CRYSTAL-SMD-5X3]  22.23,117.73 90 top
Q11  12 MHz  [CRYSTAL-SMD-5X3]  73.03,117.73 90 top
Q12  12 MHz  [CRYSTAL-SMD-5X3]  188.34,55.75 90 top
Q13  12 MHz  [CRYSTAL-SMD-5X3]  137.54,86.74 90 top
Q14  12 MHz  [CRYSTAL-SMD-5X3]  188.34,86.74 90 top
Q15  12 MHz  [CRYSTAL-SMD-5X3]  137.54,117.73 90 top
Q16  12 MHz  [CRYSTAL-SMD-5X3]  188.34,117.73 90 top
Q17  12 MHz  [CRYSTAL-SMD-5X3]  22.23,162.43 90 top
Q18  12 MHz  [CRYSTAL-SMD-5X3]  73.03,162.43 90 top
Q19  12 MHz  [CRYSTAL-SMD-5X3]  22.23,193.42 90 top
Q20  12 MHz  [CRYSTAL-SMD-5X3]  73.03,193.42 90 top
Q21  12 MHz  [CRYSTAL-SMD-5X3]  22.23,224.41 90 top
Q22  12 MHz  [CRYSTAL-SMD-5X3]  73.03,224.41 90 top
Q23  12 MHz  [CRYSTAL-SMD-5X3]  22.23,255.4 90 top
Q24  12 MHz  [CRYSTAL-SMD-5X3]  73.03,255.4 90 top
Q25  12 MHz  [CRYSTAL-SMD-5X3]  137.54,162.43 90 top
Q26  12 MHz  [CRYSTAL-SMD-5X3]  188.34,162.43 90 top
Q27  12 MHz  [CRYSTAL-SMD-5X3]  137.54,193.42 90 top
Q28  12 MHz  [CRYSTAL-SMD-5X3]  188.34,193.42 90 top
Q29  12 MHz  [CRYSTAL-SMD-5X3]  137.54,224.41 90 top
Q30  12 MHz  [CRYSTAL-SMD-5X3]  188.34,224.41 90 top
Q31  12 MHz  [CRYSTAL-SMD-5X3]  137.54,255.4 90 top
Q32  12 MHz  [CRYSTAL-SMD-5X3]  188.34,255.4 90 top
R1  27  [0603-RES]  21.59,19.56 0 top
R2  27  [0603-RES]  21.59,18.29 0 top
R3  1.5K  [0603-RES]  21.59,17.02 0 top
R4  1K  [0603-RES]  24.26,14.1 180 top
R5  1K  [0603-RES]  19.05,14.1 180 top
R6  1K  [0603-RES]  22.86,32.26 180 top
R7  100  [0603-RES]  45.72,25.91 90 top
R8  100  [0603-RES]  45.72,22.61 270 top
R9  1K  [0603-RES]  19.68,31.62 270 top
R10  22K  [0603-RES]  38.1,17.02 180 top
R11  27  [0603-RES]  72.39,19.56 0 top
R12  27  [0603-RES]  72.39,18.29 0 top
R13  1.5K  [0603-RES]  72.39,17.02 0 top
R14  1K  [0603-RES]  75.06,14.1 180 top
R15  1K  [0603-RES]  69.85,14.1 180 top
R16  1K  [0603-RES]  73.66,32.26 180 top
R17  100  [0603-RES]  96.52,25.91 90 top
R18  100  [0603-RES]  96.52,22.61 270 top
R19  1K  [0603-RES]  70.48,31.62 270 top
R20  22K  [0603-RES]  88.9,17.02 180 top
R21  27  [0603-RES]  136.91,19.56 0 top
R22  27  [0603-RES]  136.91,18.29 0 top
R23  1.5K  [0603-RES]  136.91,17.02 0 top
R24  1K  [0603-RES]  139.57,14.1 180 top
R25  1K  [0603-RES]  134.37,14.1 180 top
R26  1K  [0603-RES]  138.18,32.26 180 top
R27  100  [0603-RES]  161.04,25.91 90 top
R28  100  [0603-RES]  161.04,22.61 270 top
R29  1K  [0603-RES]  135,31.62 270 top
R30  22K  [0603-RES]  153.42,17.02 180 top
R31  27  [0603-RES]  21.59,50.55 0 top
R32  27  [0603-RES]  21.59,49.28 0 top
R33  1.5K  [0603-RES]  21.59,48.01 0 top
R34  1K  [0603-RES]  24.26,45.09 180 top
R35  1K  [0603-RES]  19.05,45.09 180 top
R36  1K  [0603-RES]  22.86,63.25 180 top
R37  100  [0603-RES]  45.72,56.9 90 top
R38  100  [0603-RES]  45.72,53.59 270 top
R39  1K  [0603-RES]  19.68,62.61 270 top
R40  22K  [0603-RES]  38.1,48.01 180 top
R41  27  [0603-RES]  72.39,50.55 0 top
R42  27  [0603-RES]  72.39,49.28 0 top
R43  1.5K  [0603-RES]  72.39,48.01 0 top
R44  1K  [0603-RES]  75.06,45.09 180 top
R45  1K  [0603-RES]  69.85,45.09 180 top
R46  1K  [0603-RES]  73.66,63.25 180 top
R47  100  [0603-RES]  96.52,56.9 90 top
R48  100  [0603-RES]  96.52,53.59 270 top
R49  1K  [0603-RES]  70.48,62.61 270 top
R50  22K  [0603-RES]  88.9,48.01 180 top
R51  27  [0603-RES]  187.71,19.56 0 top
R52  27  [0603-RES]  187.71,18.29 0 top
R53  1.5K  [0603-RES]  187.71,17.02 0 top
R54  1K  [0603-RES]  190.37,14.1 180 top
R55  1K  [0603-RES]  185.17,14.1 180 top
R56  1K  [0603-RES]  188.98,32.26 180 top
R57  100  [0603-RES]  211.84,25.91 90 top
R58  100  [0603-RES]  211.84,22.61 270 top
R59  1K  [0603-RES]  185.8,31.62 270 top
R60  22K  [0603-RES]  204.22,17.02 180 top
R61  27  [0603-RES]  21.59,81.53 0 top
R62  27  [0603-RES]  21.59,80.26 0 top
R63  1.5K  [0603-RES]  21.59,78.99 0 top
R64  1K  [0603-RES]  24.26,76.07 180 top
R65  1K  [0603-RES]  19.05,76.07 180 top
R66  1K  [0603-RES]  22.86,94.23 180 top
R67  100  [0603-RES]  45.72,87.88 90 top
R68  100  [0603-RES]  45.72,84.58 270 top
R69  1K  [0603-RES]  19.68,93.6 270 top
R70  22K  [0603-RES]  38.1,78.99 180 top
R71  27  [0603-RES]  72.39,81.53 0 top
R72  27  [0603-RES]  72.39,80.26 0 top
R73  1.5K  [0603-RES]  72.39,78.99 0 top
R74  1K  [0603-RES]  75.06,76.07 180 top
R75  1K  [0603-RES]  69.85,76.07 180 top
R76  1K  [0603-RES]  73.66,94.23 180 top
R77  100  [0603-RES]  96.52,87.88 90 top
R78  100  [0603-RES]  96.52,84.58 270 top
R79  1K  [0603-RES]  70.48,93.6 270 top
R80  22K  [0603-RES]  88.9,78.99 180 top
R81  27  [0603-RES]  136.91,50.55 0 top
R82  27  [0603-RES]  136.91,49.28 0 top
R83  1.5K  [0603-RES]  136.91,48.01 0 top
R84  1K  [0603-RES]  139.57,45.09 180 top
R85  1K  [0603-RES]  134.37,45.09 180 top
R86  1K  [0603-RES]  138.18,63.25 180 top
R87  100  [0603-RES]  161.04,56.9 90 top
R88  100  [0603-RES]  161.04,53.59 270 top
R89  1K  [0603-RES]  135,62.61 270 top
R90  22K  [0603-RES]  153.42,48.01 180 top
R91  27  [0603-RES]  21.59,112.52 0 top
R92  27  [0603-RES]  21.59,111.25 0 top
R93  1.5K  [0603-RES]  21.59,109.98 0 top
R94  1K  [0603-RES]  24.26,107.06 180 top
R95  1K  [0603-RES]  19.05,107.06 180 top
R96  1K  [0603-RES]  22.86,125.22 180 top
R97  100  [0603-RES]  45.72,118.87 90 top
R98  100  [0603-RES]  45.72,115.57 270 top
R99  1K  [0603-RES]  19.68,124.59 270 top
R100  22K  [0603-RES]  38.1,109.98 180 top
R101  27  [0603-RES]  72.39,112.52 0 top
R102  27  [0603-RES]  72.39,111.25 0 top
R103  1.5K  [0603-RES]  72.39,109.98 0 top
R104  1K  [0603-RES]  75.06,107.06 180 top
R105  1K  [0603-RES]  69.85,107.06 180 top
R106  1K  [0603-RES]  73.66,125.22 180 top
R107  100  [0603-RES]  96.52,118.87 90 top
R108  100  [0603-RES]  96.52,115.57 270 top
R109  1K  [0603-RES]  70.48,124.59 270 top
R110  22K  [0603-RES]  88.9,109.98 180 top
R111  27  [0603-RES]  187.71,50.55 0 top
R112  27  [0603-RES]  187.71,49.28 0 top
R113  1.5K  [0603-RES]  187.71,48.01 0 top
R114  1K  [0603-RES]  190.37,45.09 180 top
R115  1K  [0603-RES]  185.17,45.09 180 top
R116  1K  [0603-RES]  188.98,63.25 180 top
R117  100  [0603-RES]  211.84,56.9 90 top
R118  100  [0603-RES]  211.84,53.59 270 top
R119  1K  [0603-RES]  185.8,62.61 270 top
R120  22K  [0603-RES]  204.22,48.01 180 top
R121  27  [0603-RES]  136.91,81.53 0 top
R122  27  [0603-RES]  136.91,80.26 0 top
R123  1.5K  [0603-RES]  136.91,78.99 0 top
R124  1K  [0603-RES]  139.57,76.07 180 top
R125  1K  [0603-RES]  134.37,76.07 180 top
R126  1K  [0603-RES]  138.18,94.23 180 top
R127  100  [0603-RES]  161.04,87.88 90 top
R128  100  [0603-RES]  161.04,84.58 270 top
R129  1K  [0603-RES]  135,93.6 270 top
R130  22K  [0603-RES]  153.42,78.99 180 top
R131  27  [0603-RES]  187.71,81.53 0 top
R132  27  [0603-RES]  187.71,80.26 0 top
R133  1.5K  [0603-RES]  187.71,78.99 0 top
R134  1K  [0603-RES]  190.37,76.07 180 top
R135  1K  [0603-RES]  185.17,76.07 180 top
R136  1K  [0603-RES]  188.98,94.23 180 top
R137  100  [0603-RES]  211.84,87.88 90 top
R138  100  [0603-RES]  211.84,84.58 270 top
R139  1K  [0603-RES]  185.8,93.6 270 top
R140  22K  [0603-RES]  204.22,78.99 180 top
R141  27  [0603-RES]  136.91,112.52 0 top
R142  27  [0603-RES]  136.91,111.25 0 top
R143  1.5K  [0603-RES]  136.91,109.98 0 top
R144  1K  [0603-RES]  139.57,107.06 180 top
R145  1K  [0603-RES]  134.37,107.06 180 top
R146  1K  [0603-RES]  138.18,125.22 180 top
R147  100  [0603-RES]  161.04,118.87 90 top
R148  100  [0603-RES]  161.04,115.57 270 top
R149  1K  [0603-RES]  135,124.59 270 top
R150  22K  [0603-RES]  153.42,109.98 180 top
R151  27  [0603-RES]  187.71,112.52 0 top
R152  27  [0603-RES]  187.71,111.25 0 top
R153  1.5K  [0603-RES]  187.71,109.98 0 top
R154  1K  [0603-RES]  190.37,107.06 180 top
R155  1K  [0603-RES]  185.17,107.06 180 top
R156  1K  [0603-RES]  188.98,125.22 180 top
R157  100  [0603-RES]  211.84,118.87 90 top
R158  100  [0603-RES]  211.84,115.57 270 top
R159  1K  [0603-RES]  185.8,124.59 270 top
R160  22K  [0603-RES]  204.22,109.98 180 top
R161  27  [0603-RES]  21.59,157.23 0 top
R162  27  [0603-RES]  21.59,155.96 0 top
R163  1.5K  [0603-RES]  21.59,154.69 0 top
R164  1K  [0603-RES]  24.26,151.76 180 top
R165  1K  [0603-RES]  19.05,151.76 180 top
R166  1K  [0603-RES]  22.86,169.93 180 top
R167  100  [0603-RES]  45.72,163.58 90 top
R168  100  [0603-RES]  45.72,160.27 270 top
R169  1K  [0603-RES]  19.68,169.29 270 top
R170  22K  [0603-RES]  38.1,154.69 180 top
R171  27  [0603-RES]  72.39,157.23 0 top
R172  27  [0603-RES]  72.39,155.96 0 top
R173  1.5K  [0603-RES]  72.39,154.69 0 top
R174  1K  [0603-RES]  75.06,151.76 180 top
R175  1K  [0603-RES]  69.85,151.76 180 top
R176  1K  [0603-RES]  73.66,169.93 180 top
R177  100  [0603-RES]  96.52,163.58 90 top
R178  100  [0603-RES]  96.52,160.27 270 top
R179  1K  [0603-RES]  70.48,169.29 270 top
R180  22K  [0603-RES]  88.9,154.69 180 top
R181  27  [0603-RES]  21.59,188.21 0 top
R182  27  [0603-RES]  21.59,186.94 0 top
R183  1.5K  [0603-RES]  21.59,185.67 0 top
R184  1K  [0603-RES]  24.26,182.75 180 top
R185  1K  [0603-RES]  19.05,182.75 180 top
R186  1K  [0603-RES]  22.86,200.91 180 top
R187  100  [0603-RES]  45.72,194.56 90 top
R188  100  [0603-RES]  45.72,191.26 270 top
R189  1K  [0603-RES]  19.68,200.28 270 top
R190  22K  [0603-RES]  38.1,185.67 180 top
R191  27  [0603-RES]  72.39,188.21 0 top
R192  27  [0603-RES]  72.39,186.94 0 top
R193  1.5K  [0603-RES]  72.39,185.67 0 top
R194  1K  [0603-RES]  75.06,182.75 180 top
R195  1K  [0603-RES]  69.85,182.75 180 top
R196  1K  [0603-RES]  73.66,200.91 180 top
R197  100  [0603-RES]  96.52,194.56 90 top
R198  100  [0603-RES]  96.52,191.26 270 top
R199  1K  [0603-RES]  70.48,200.28 270 top
R200  22K  [0603-RES]  88.9,185.67 180 top
R201  27  [0603-RES]  21.59,219.2 0 top
R202  27  [0603-RES]  21.59,217.93 0 top
R203  1.5K  [0603-RES]  21.59,216.66 0 top
R204  1K  [0603-RES]  24.26,213.74 180 top
R205  1K  [0603-RES]  19.05,213.74 180 top
R206  1K  [0603-RES]  22.86,231.9 180 top
R207  100  [0603-RES]  45.72,225.55 90 top
R208  100  [0603-RES]  45.72,222.25 270 top
R209  1K  [0603-RES]  19.68,231.27 270 top
R210  22K  [0603-RES]  38.1,216.66 180 top
R211  27  [0603-RES]  72.39,219.2 0 top
R212  27  [0603-RES]  72.39,217.93 0 top
R213  1.5K  [0603-RES]  72.39,216.66 0 top
R214  1K  [0603-RES]  75.06,213.74 180 top
R215  1K  [0603-RES]  69.85,213.74 180 top
R216  1K  [0603-RES]  73.66,231.9 180 top
R217  100  [0603-RES]  96.52,225.55 90 top
R218  100  [0603-RES]  96.52,222.25 270 top
R219  1K  [0603-RES]  70.48,231.27 270 top
R220  22K  [0603-RES]  88.9,216.66 180 top
R221  27  [0603-RES]  21.59,250.19 0 top
R222  27  [0603-RES]  21.59,248.92 0 top
R223  1.5K  [0603-RES]  21.59,247.65 0 top
R224  1K  [0603-RES]  24.26,244.73 180 top
R225  1K  [0603-RES]  19.05,244.73 180 top
R226  1K  [0603-RES]  22.86,262.89 180 top
R227  100  [0603-RES]  45.72,256.54 90 top
R228  100  [0603-RES]  45.72,253.24 270 top
R229  1K  [0603-RES]  19.68,262.25 270 top
R230  22K  [0603-RES]  38.1,247.65 180 top
R231  27  [0603-RES]  72.39,250.19 0 top
R232  27  [0603-RES]  72.39,248.92 0 top
R233  1.5K  [0603-RES]  72.39,247.65 0 top
R234  1K  [0603-RES]  75.06,244.73 180 top
R235  1K  [0603-RES]  69.85,244.73 180 top
R236  1K  [0603-RES]  73.66,262.89 180 top
R237  100  [0603-RES]  96.52,256.54 90 top
R238  100  [0603-RES]  96.52,253.24 270 top
R239  1K  [0603-RES]  70.48,262.25 270 top
R240  22K  [0603-RES]  88.9,247.65 180 top
R241  27  [0603-RES]  136.91,157.23 0 top
R242  27  [0603-RES]  136.91,155.96 0 top
R243  1.5K  [0603-RES]  136.91,154.69 0 top
R244  1K  [0603-RES]  139.57,151.76 180 top
R245  1K  [0603-RES]  134.37,151.76 180 top
R246  1K  [0603-RES]  138.18,169.93 180 top
R247  100  [0603-RES]  161.04,163.58 90 top
R248  100  [0603-RES]  161.04,160.27 270 top
R249  1K  [0603-RES]  135,169.29 270 top
R250  22K  [0603-RES]  153.42,154.69 180 top
R251  27  [0603-RES]  187.71,157.23 0 top
R252  27  [0603-RES]  187.71,155.96 0 top
R253  1.5K  [0603-RES]  187.71,154.69 0 top
R254  1K  [0603-RES]  190.37,151.76 180 top
R255  1K  [0603-RES]  185.17,151.76 180 top
R256  1K  [0603-RES]  188.98,169.93 180 top
R257  100  [0603-RES]  211.84,163.58 90 top
R258  100  [0603-RES]  211.84,160.27 270 top
R259  1K  [0603-RES]  185.8,169.29 270 top
R260  22K  [0603-RES]  204.22,154.69 180 top
R261  27  [0603-RES]  136.91,188.21 0 top
R262  27  [0603-RES]  136.91,186.94 0 top
R263  1.5K  [0603-RES]  136.91,185.67 0 top
R264  1K  [0603-RES]  139.57,182.75 180 top
R265  1K  [0603-RES]  134.37,182.75 180 top
R266  1K  [0603-RES]  138.18,200.91 180 top
R267  100  [0603-RES]  161.04,194.56 90 top
R268  100  [0603-RES]  161.04,191.26 270 top
R269  1K  [0603-RES]  135,200.28 270 top
R270  22K  [0603-RES]  153.42,185.67 180 top
R271  27  [0603-RES]  187.71,188.21 0 top
R272  27  [0603-RES]  187.71,186.94 0 top
R273  1.5K  [0603-RES]  187.71,185.67 0 top
R274  1K  [0603-RES]  190.37,182.75 180 top
R275  1K  [0603-RES]  185.17,182.75 180 top
R276  1K  [0603-RES]  188.98,200.91 180 top
R277  100  [0603-RES]  211.84,194.56 90 top
R278  100  [0603-RES]  211.84,191.26 270 top
R279  1K  [0603-RES]  185.8,200.28 270 top
R280  22K  [0603-RES]  204.22,185.67 180 top
R281  27  [0603-RES]  136.91,219.2 0 top
R282  27  [0603-RES]  136.91,217.93 0 top
R283  1.5K  [0603-RES]  136.91,216.66 0 top
R284  1K  [0603-RES]  139.57,213.74 180 top
R285  1K  [0603-RES]  134.37,213.74 180 top
R286  1K  [0603-RES]  138.18,231.9 180 top
R287  100  [0603-RES]  161.04,225.55 90 top
R288  100  [0603-RES]  161.04,222.25 270 top
R289  1K  [0603-RES]  135,231.27 270 top
R290  22K  [0603-RES]  153.42,216.66 180 top
R291  27  [0603-RES]  187.71,219.2 0 top
R292  27  [0603-RES]  187.71,217.93 0 top
R293  1.5K  [0603-RES]  187.71,216.66 0 top
R294  1K  [0603-RES]  190.37,213.74 180 top
R295  1K  [0603-RES]  185.17,213.74 180 top
R296  1K  [0603-RES]  188.98,231.9 180 top
R297  100  [0603-RES]  211.84,225.55 90 top
R298  100  [0603-RES]  211.84,222.25 270 top
R299  1K  [0603-RES]  185.8,231.27 270 top
R300  22K  [0603-RES]  204.22,216.66 180 top
R301  27  [0603-RES]  136.91,250.19 0 top
R302  27  [0603-RES]  136.91,248.92 0 top
R303  1.5K  [0603-RES]  136.91,247.65 0 top
R304  1K  [0603-RES]  139.57,244.73 180 top
R305  1K  [0603-RES]  134.37,244.73 180 top
R306  1K  [0603-RES]  138.18,262.89 180 top
R307  100  [0603-RES]  161.04,256.54 90 top
R308  100  [0603-RES]  161.04,253.24 270 top
R309  1K  [0603-RES]  135,262.25 270 top
R310  22K  [0603-RES]  153.42,247.65 180 top
R311  27  [0603-RES]  187.71,250.19 0 top
R312  27  [0603-RES]  187.71,248.92 0 top
R313  1.5K  [0603-RES]  187.71,247.65 0 top
R314  1K  [0603-RES]  190.37,244.73 180 top
R315  1K  [0603-RES]  185.17,244.73 180 top
R316  1K  [0603-RES]  188.98,262.89 180 top
R317  100  [0603-RES]  211.84,256.54 90 top
R318  100  [0603-RES]  211.84,253.24 270 top
R319  1K  [0603-RES]  185.8,262.25 270 top
R320  22K  [0603-RES]  204.22,247.65 180 top
S1  Power Select  [AYZ0202]  38.1,11.94 0 top
S2  Power Select  [AYZ0202]  88.9,11.94 0 top
S3  Power Select  [AYZ0202]  153.42,11.94 0 top
S4  Power Select  [AYZ0202]  38.1,42.93 0 top
S5  Power Select  [AYZ0202]  88.9,42.93 0 top
S6  Power Select  [AYZ0202]  204.22,11.94 0 top
S7  Power Select  [AYZ0202]  38.1,73.91 0 top
S8  Power Select  [AYZ0202]  88.9,73.91 0 top
S9  Power Select  [AYZ0202]  153.42,42.93 0 top
S10  Power Select  [AYZ0202]  38.1,104.9 0 top
S11  Power Select  [AYZ0202]  88.9,104.9 0 top
S12  Power Select  [AYZ0202]  204.22,42.93 0 top
S13  Power Select  [AYZ0202]  153.42,73.91 0 top
S14  Power Select  [AYZ0202]  204.22,73.91 0 top
S15  Power Select  [AYZ0202]  153.42,104.9 0 top
S16  Power Select  [AYZ0202]  204.22,104.9 0 top
S17  Power Select  [AYZ0202]  38.1,149.61 0 top
S18  Power Select  [AYZ0202]  88.9,149.61 0 top
S19  Power Select  [AYZ0202]  38.1,180.59 0 top
S20  Power Select  [AYZ0202]  88.9,180.59 0 top
S21  Power Select  [AYZ0202]  38.1,211.58 0 top
S22  Power Select  [AYZ0202]  88.9,211.58 0 top
S23  Power Select  [AYZ0202]  38.1,242.57 0 top
S24  Power Select  [AYZ0202]  88.9,242.57 0 top
S25  Power Select  [AYZ0202]  153.42,149.61 0 top
S26  Power Select  [AYZ0202]  204.22,149.61 0 top
S27  Power Select  [AYZ0202]  153.42,180.59 0 top
S28  Power Select  [AYZ0202]  204.22,180.59 0 top
S29  Power Select  [AYZ0202]  153.42,211.58 0 top
S30  Power Select  [AYZ0202]  204.22,211.58 0 top
S31  Power Select  [AYZ0202]  153.42,242.57 0 top
S32  Power Select  [AYZ0202]  204.22,242.57 0 top
U1  ATTINY2313-20S  [SO20L]  30.48,23.37 270 top
U2  74ACT125D  [SO014]  40.64,22.1 90 top
U3  ATTINY2313-20S  [SO20L]  81.28,23.37 270 top
U4  74ACT125D  [SO014]  91.44,22.1 90 top
U5  ATTINY2313-20S  [SO20L]  145.8,23.37 270 top
U6  74ACT125D  [SO014]  155.96,22.1 90 top
U7  ATTINY2313-20S  [SO20L]  30.48,54.36 270 top
U8  74ACT125D  [SO014]  40.64,53.09 90 top
U9  ATTINY2313-20S  [SO20L]  81.28,54.36 270 top
U10  74ACT125D  [SO014]  91.44,53.09 90 top
U11  ATTINY2313-20S  [SO20L]  196.6,23.37 270 top
U12  74ACT125D  [SO014]  206.76,22.1 90 top
U13  ATTINY2313-20S  [SO20L]  30.48,85.34 270 top
U14  74ACT125D  [SO014]  40.64,84.07 90 top
U15  ATTINY2313-20S  [SO20L]  81.28,85.34 270 top
U16  74ACT125D  [SO014]  91.44,84.07 90 top
U17  ATTINY2313-20S  [SO20L]  145.8,54.36 270 top
U18  74ACT125D  [SO014]  155.96,53.09 90 top
U19  ATTINY2313-20S  [SO20L]  30.48,116.33 270 top
U20  74ACT125D  [SO014]  40.64,115.06 90 top
U21  ATTINY2313-20S  [SO20L]  81.28,116.33 270 top
U22  74ACT125D  [SO014]  91.44,115.06 90 top
U23  ATTINY2313-20S  [SO20L]  196.6,54.36 270 top
U24  74ACT125D  [SO014]  206.76,53.09 90 top
U25  ATTINY2313-20S  [SO20L]  145.8,85.34 270 top
U26  74ACT125D  [SO014]  155.96,84.07 90 top
U27  ATTINY2313-20S  [SO20L]  196.6,85.34 270 top
U28  74ACT125D  [SO014]  206.76,84.07 90 top
U29  ATTINY2313-20S  [SO20L]  145.8,116.33 270 top
U30  74ACT125D  [SO014]  155.96,115.06 90 top
U31  ATTINY2313-20S  [SO20L]  196.6,116.33 270 top
U32  74ACT125D  [SO014]  206.76,115.06 90 top
U33  ATTINY2313-20S  [SO20L]  30.48,161.04 270 top
U34  74ACT125D  [SO014]  40.64,159.77 90 top
U35  ATTINY2313-20S  [SO20L]  81.28,161.04 270 top
U36  74ACT125D  [SO014]  91.44,159.77 90 top
U37  ATTINY2313-20S  [SO20L]  30.48,192.02 270 top
U38  74ACT125D  [SO014]  40.64,190.75 90 top
U39  ATTINY2313-20S  [SO20L]  81.28,192.02 270 top
U40  74ACT125D  [SO014]  91.44,190.75 90 top
U41  ATTINY2313-20S  [SO20L]  30.48,223.01 270 top
U42  74ACT125D  [SO014]  40.64,221.74 90 top
U43  ATTINY2313-20S  [SO20L]  81.28,223.01 270 top
U44  74ACT125D  [SO014]  91.44,221.74 90 top
U45  ATTINY2313-20S  [SO20L]  30.48,254 270 top
U46  74ACT125D  [SO014]  40.64,252.73 90 top
U47  ATTINY2313-20S  [SO20L]  81.28,254 270 top
U48  74ACT125D  [SO014]  91.44,252.73 90 top
U49  ATTINY2313-20S  [SO20L]  145.8,161.04 270 top
U50  74ACT125D  [SO014]  155.96,159.77 90 top
U51  ATTINY2313-20S  [SO20L]  196.6,161.04 270 top
U52  74ACT125D  [SO014]  206.76,159.77 90 top
U53  ATTINY2313-20S  [SO20L]  145.8,192.02 270 top
U54  74ACT125D  [SO014]  155.96,190.75 90 top
U55  ATTINY2313-20S  [SO20L]  196.6,192.02 270 top
U56  74ACT125D  [SO014]  206.76,190.75 90 top
U57  ATTINY2313-20S  [SO20L]  145.8,223.01 270 top
U58  74ACT125D  [SO014]  155.96,221.74 90 top
U59  ATTINY2313-20S  [SO20L]  196.6,223.01 270 top
U60  74ACT125D  [SO014]  206.76,221.74 90 top
U61  ATTINY2313-20S  [SO20L]  145.8,254 270 top
U62  74ACT125D  [SO014]  155.96,252.73 90 top
U63  ATTINY2313-20S  [SO20L]  196.6,254 270 top
U64  74ACT125D  [SO014]  206.76,252.73 90 top
U$1  STAND-OFF  [STAND-OFF]  12.7,9.4 0 top
U$2  LOGO-SFESK  [SFE-LOGO-FLAME]  41.91,30.99 0 top
U$3  STAND-OFF  [STAND-OFF]  12.7,34.8 0 top
U$4  STAND-OFF  [STAND-OFF]  54.61,34.8 0 top
U$5  STAND-OFF  [STAND-OFF]  54.61,9.4 0 top
U$6  FIDUCIAL1X2  [FIDUCIAL-1X2]  11.43,11.94 0 top
U$7  FIDUCIAL1X2  [FIDUCIAL-1X2]  49.53,36.07 0 top
U$8  LOGO-SFENEW  [SFE-NEW-WEBLOGO]  44.2,19.81 0 bottom
U$9  STAND-OFF  [STAND-OFF]  63.5,9.4 0 top
U$10  STAND-OFF  [STAND-OFF]  63.5,34.8 0 top
U$11  STAND-OFF  [STAND-OFF]  105.41,34.8 0 top
U$12  STAND-OFF  [STAND-OFF]  105.41,9.4 0 top
U$13  FIDUCIAL1X2  [FIDUCIAL-1X2]  62.23,11.94 0 top
U$14  FIDUCIAL1X2  [FIDUCIAL-1X2]  100.33,36.07 0 top
U$15  LOGO-SFENEW  [SFE-NEW-WEBLOGO]  95,19.81 0 bottom
U$16  LOGO-SFESK  [SFE-LOGO-FLAME]  92.71,30.99 0 top
U$17  STAND-OFF  [STAND-OFF]  128.02,9.4 0 top
U$18  STAND-OFF  [STAND-OFF]  128.02,34.8 0 top
U$19  STAND-OFF  [STAND-OFF]  169.93,34.8 0 top
U$20  STAND-OFF  [STAND-OFF]  169.93,9.4 0 top
U$21  FIDUCIAL1X2  [FIDUCIAL-1X2]  126.75,11.94 0 top
U$22  FIDUCIAL1X2  [FIDUCIAL-1X2]  164.85,36.07 0 top
U$23  LOGO-SFENEW  [SFE-NEW-WEBLOGO]  159.51,19.81 0 bottom
U$24  LOGO-SFESK  [SFE-LOGO-FLAME]  157.23,30.99 0 top
U$25  STAND-OFF  [STAND-OFF]  12.7,40.39 0 top
U$26  STAND-OFF  [STAND-OFF]  12.7,65.79 0 top
U$27  STAND-OFF  [STAND-OFF]  54.61,65.79 0 top
U$28  STAND-OFF  [STAND-OFF]  54.61,40.39 0 top
U$29  FIDUCIAL1X2  [FIDUCIAL-1X2]  11.43,42.93 0 top
U$30  FIDUCIAL1X2  [FIDUCIAL-1X2]  49.53,67.06 0 top
U$31  LOGO-SFENEW  [SFE-NEW-WEBLOGO]  44.2,50.8 0 bottom
U$32  LOGO-SFESK  [SFE-LOGO-FLAME]  41.91,61.98 0 top
U$33  STAND-OFF  [STAND-OFF]  63.5,40.39 0 top
U$34  STAND-OFF  [STAND-OFF]  63.5,65.79 0 top
U$35  STAND-OFF  [STAND-OFF]  105.41,65.79 0 top
U$36  STAND-OFF  [STAND-OFF]  105.41,40.39 0 top
U$37  FIDUCIAL1X2  [FIDUCIAL-1X2]  62.23,42.93 0 top
U$38  FIDUCIAL1X2  [FIDUCIAL-1X2]  100.33,67.06 0 top
U$39  LOGO-SFENEW  [SFE-NEW-WEBLOGO]  95,50.8 0 bottom
U$40  LOGO-SFESK  [SFE-LOGO-FLAME]  92.71,61.98 0 top
U$41  STAND-OFF  [STAND-OFF]  178.82,9.4 0 top
U$42  STAND-OFF  [STAND-OFF]  178.82,34.8 0 top
U$43  STAND-OFF  [STAND-OFF]  220.73,34.8 0 top
U$44  STAND-OFF  [STAND-OFF]  220.73,9.4 0 top
U$45  FIDUCIAL1X2  [FIDUCIAL-1X2]  177.55,11.94 0 top
U$46  FIDUCIAL1X2  [FIDUCIAL-1X2]  215.65,36.07 0 top
U$47  LOGO-SFENEW  [SFE-NEW-WEBLOGO]  210.31,19.81 0 bottom
U$48  LOGO-SFESK  [SFE-LOGO-FLAME]  208.03,30.99 0 top
U$49  STAND-OFF  [STAND-OFF]  12.7,71.37 0 top
U$50  STAND-OFF  [STAND-OFF]  12.7,96.77 0 top
U$51  STAND-OFF  [STAND-OFF]  54.61,96.77 0 top
U$52  STAND-OFF  [STAND-OFF]  54.61,71.37 0 top
U$53  FIDUCIAL1X2  [FIDUCIAL-1X2]  11.43,73.91 0 top
U$54  FIDUCIAL1X2  [FIDUCIAL-1X2]  49.53,98.04 0 top
U$55  LOGO-SFENEW  [SFE-NEW-WEBLOGO]  44.2,81.79 0 bottom
U$56  LOGO-SFESK  [SFE-LOGO-FLAME]  41.91,92.96 0 top
U$57  STAND-OFF  [STAND-OFF]  63.5,71.37 0 top
U$58  STAND-OFF  [STAND-OFF]  63.5,96.77 0 top
U$59  STAND-OFF  [STAND-OFF]  105.41,96.77 0 top
U$60  STAND-OFF  [STAND-OFF]  105.41,71.37 0 top
U$61  FIDUCIAL1X2  [FIDUCIAL-1X2]  62.23,73.91 0 top
U$62  FIDUCIAL1X2  [FIDUCIAL-1X2]  100.33,98.04 0 top
U$63  LOGO-SFENEW  [SFE-NEW-WEBLOGO]  95,81.79 0 bottom
U$64  LOGO-SFESK  [SFE-LOGO-FLAME]  92.71,92.96 0 top
U$65  STAND-OFF  [STAND-OFF]  128.02,40.39 0 top
U$66  STAND-OFF  [STAND-OFF]  128.02,65.79 0 top
U$67  STAND-OFF  [STAND-OFF]  169.93,65.79 0 top
U$68  STAND-OFF  [STAND-OFF]  169.93,40.39 0 top
U$69  FIDUCIAL1X2  [FIDUCIAL-1X2]  126.75,42.93 0 top
U$70  FIDUCIAL1X2  [FIDUCIAL-1X2]  164.85,67.06 0 top
U$71  LOGO-SFENEW  [SFE-NEW-WEBLOGO]  159.51,50.8 0 bottom
U$72  LOGO-SFESK  [SFE-LOGO-FLAME]  157.23,61.98 0 top
U$73  STAND-OFF  [STAND-OFF]  12.7,102.36 0 top
U$74  STAND-OFF  [STAND-OFF]  12.7,127.76 0 top
U$75  STAND-OFF  [STAND-OFF]  54.61,127.76 0 top
U$76  STAND-OFF  [STAND-OFF]  54.61,102.36 0 top
U$77  FIDUCIAL1X2  [FIDUCIAL-1X2]  11.43,104.9 0 top
U$78  FIDUCIAL1X2  [FIDUCIAL-1X2]  49.53,129.03 0 top
U$79  LOGO-SFENEW  [SFE-NEW-WEBLOGO]  44.2,112.78 0 bottom
U$80  LOGO-SFESK  [SFE-LOGO-FLAME]  41.91,123.95 0 top
U$81  STAND-OFF  [STAND-OFF]  63.5,102.36 0 top
U$82  STAND-OFF  [STAND-OFF]  63.5,127.76 0 top
U$83  STAND-OFF  [STAND-OFF]  105.41,127.76 0 top
U$84  STAND-OFF  [STAND-OFF]  105.41,102.36 0 top
U$85  FIDUCIAL1X2  [FIDUCIAL-1X2]  62.23,104.9 0 top
U$86  FIDUCIAL1X2  [FIDUCIAL-1X2]  100.33,129.03 0 top
U$87  LOGO-SFENEW  [SFE-NEW-WEBLOGO]  95,112.78 0 bottom
U$88  LOGO-SFESK  [SFE-LOGO-FLAME]  92.71,123.95 0 top
U$89  STAND-OFF  [STAND-OFF]  178.82,40.39 0 top
U$90  STAND-OFF  [STAND-OFF]  178.82,65.79 0 top
U$91  STAND-OFF  [STAND-OFF]  220.73,65.79 0 top
U$92  STAND-OFF  [STAND-OFF]  220.73,40.39 0 top
U$93  FIDUCIAL1X2  [FIDUCIAL-1X2]  177.55,42.93 0 top
U$94  FIDUCIAL1X2  [FIDUCIAL-1X2]  215.65,67.06 0 top
U$95  LOGO-SFENEW  [SFE-NEW-WEBLOGO]  210.31,50.8 0 bottom
U$96  LOGO-SFESK  [SFE-LOGO-FLAME]  208.03,61.98 0 top
U$97  STAND-OFF  [STAND-OFF]  128.02,71.37 0 top
U$98  STAND-OFF  [STAND-OFF]  128.02,96.77 0 top
U$99  STAND-OFF  [STAND-OFF]  169.93,96.77 0 top
U$100  STAND-OFF  [STAND-OFF]  169.93,71.37 0 top
U$101  FIDUCIAL1X2  [FIDUCIAL-1X2]  126.75,73.91 0 top
U$102  FIDUCIAL1X2  [FIDUCIAL-1X2]  164.85,98.04 0 top
U$103  LOGO-SFENEW  [SFE-NEW-WEBLOGO]  159.51,81.79 0 bottom
U$104  LOGO-SFESK  [SFE-LOGO-FLAME]  157.23,92.96 0 top
U$105  STAND-OFF  [STAND-OFF]  178.82,71.37 0 top
U$106  STAND-OFF  [STAND-OFF]  178.82,96.77 0 top
U$107  STAND-OFF  [STAND-OFF]  220.73,96.77 0 top
U$108  STAND-OFF  [STAND-OFF]  220.73,71.37 0 top
U$109  FIDUCIAL1X2  [FIDUCIAL-1X2]  177.55,73.91 0 top